# EAGLE board wordclock-r4-4x6 (EAGLE 5.11), part 1 of 2
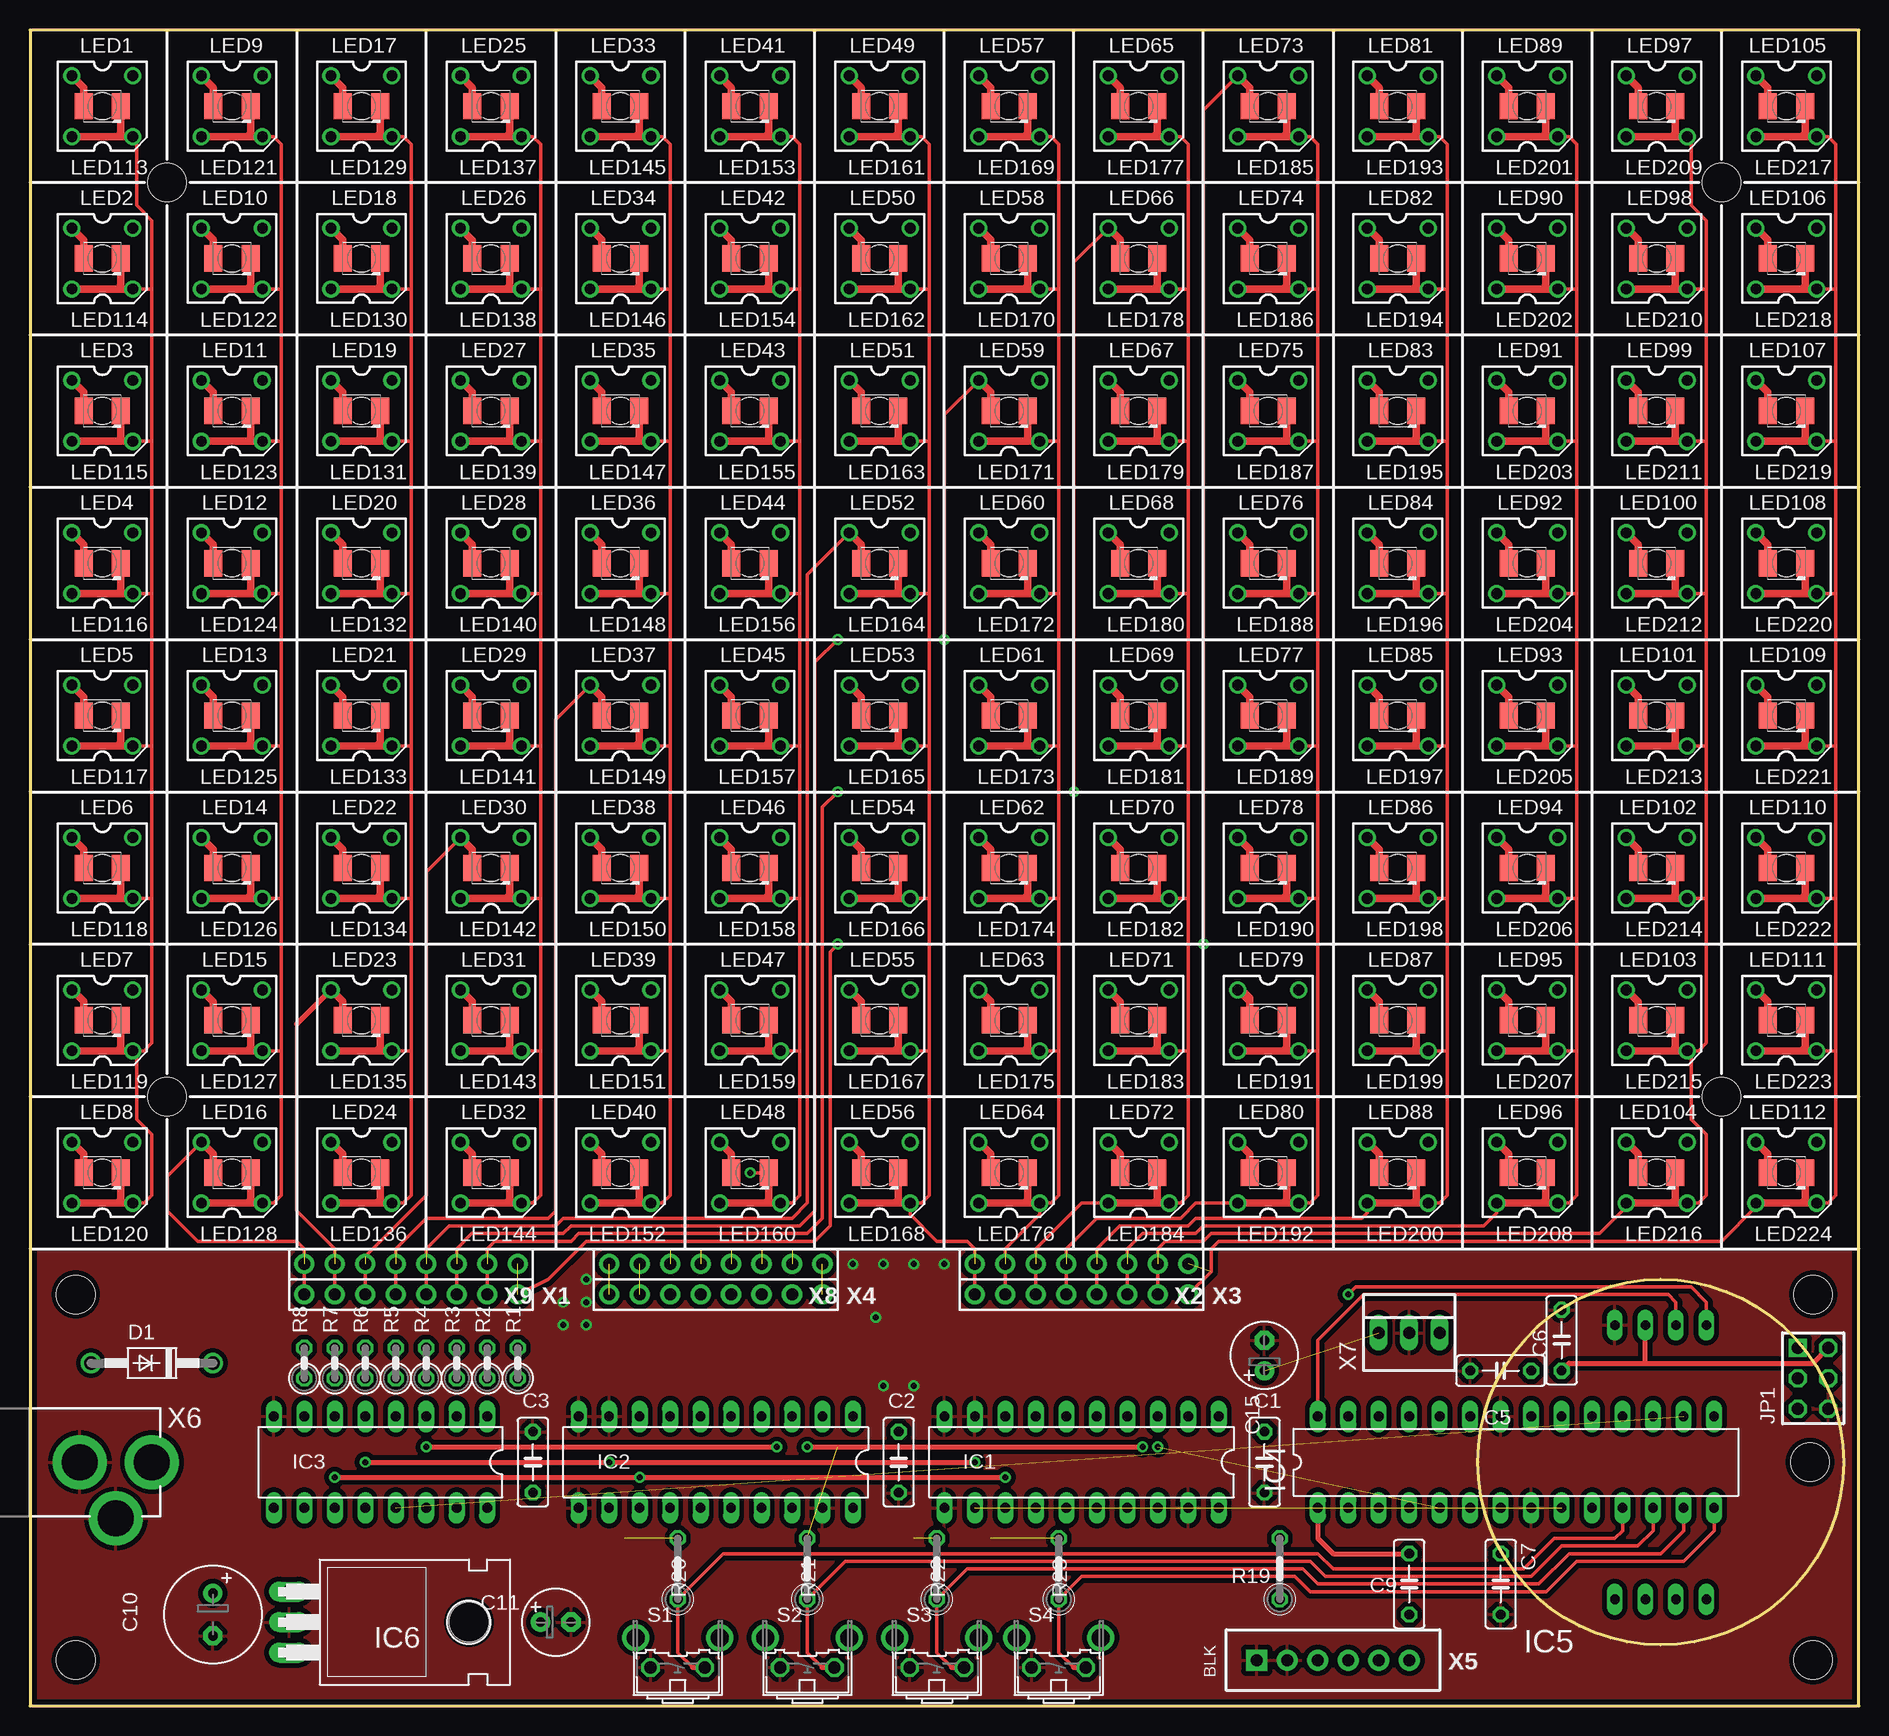
[diagram p0: board, top side]
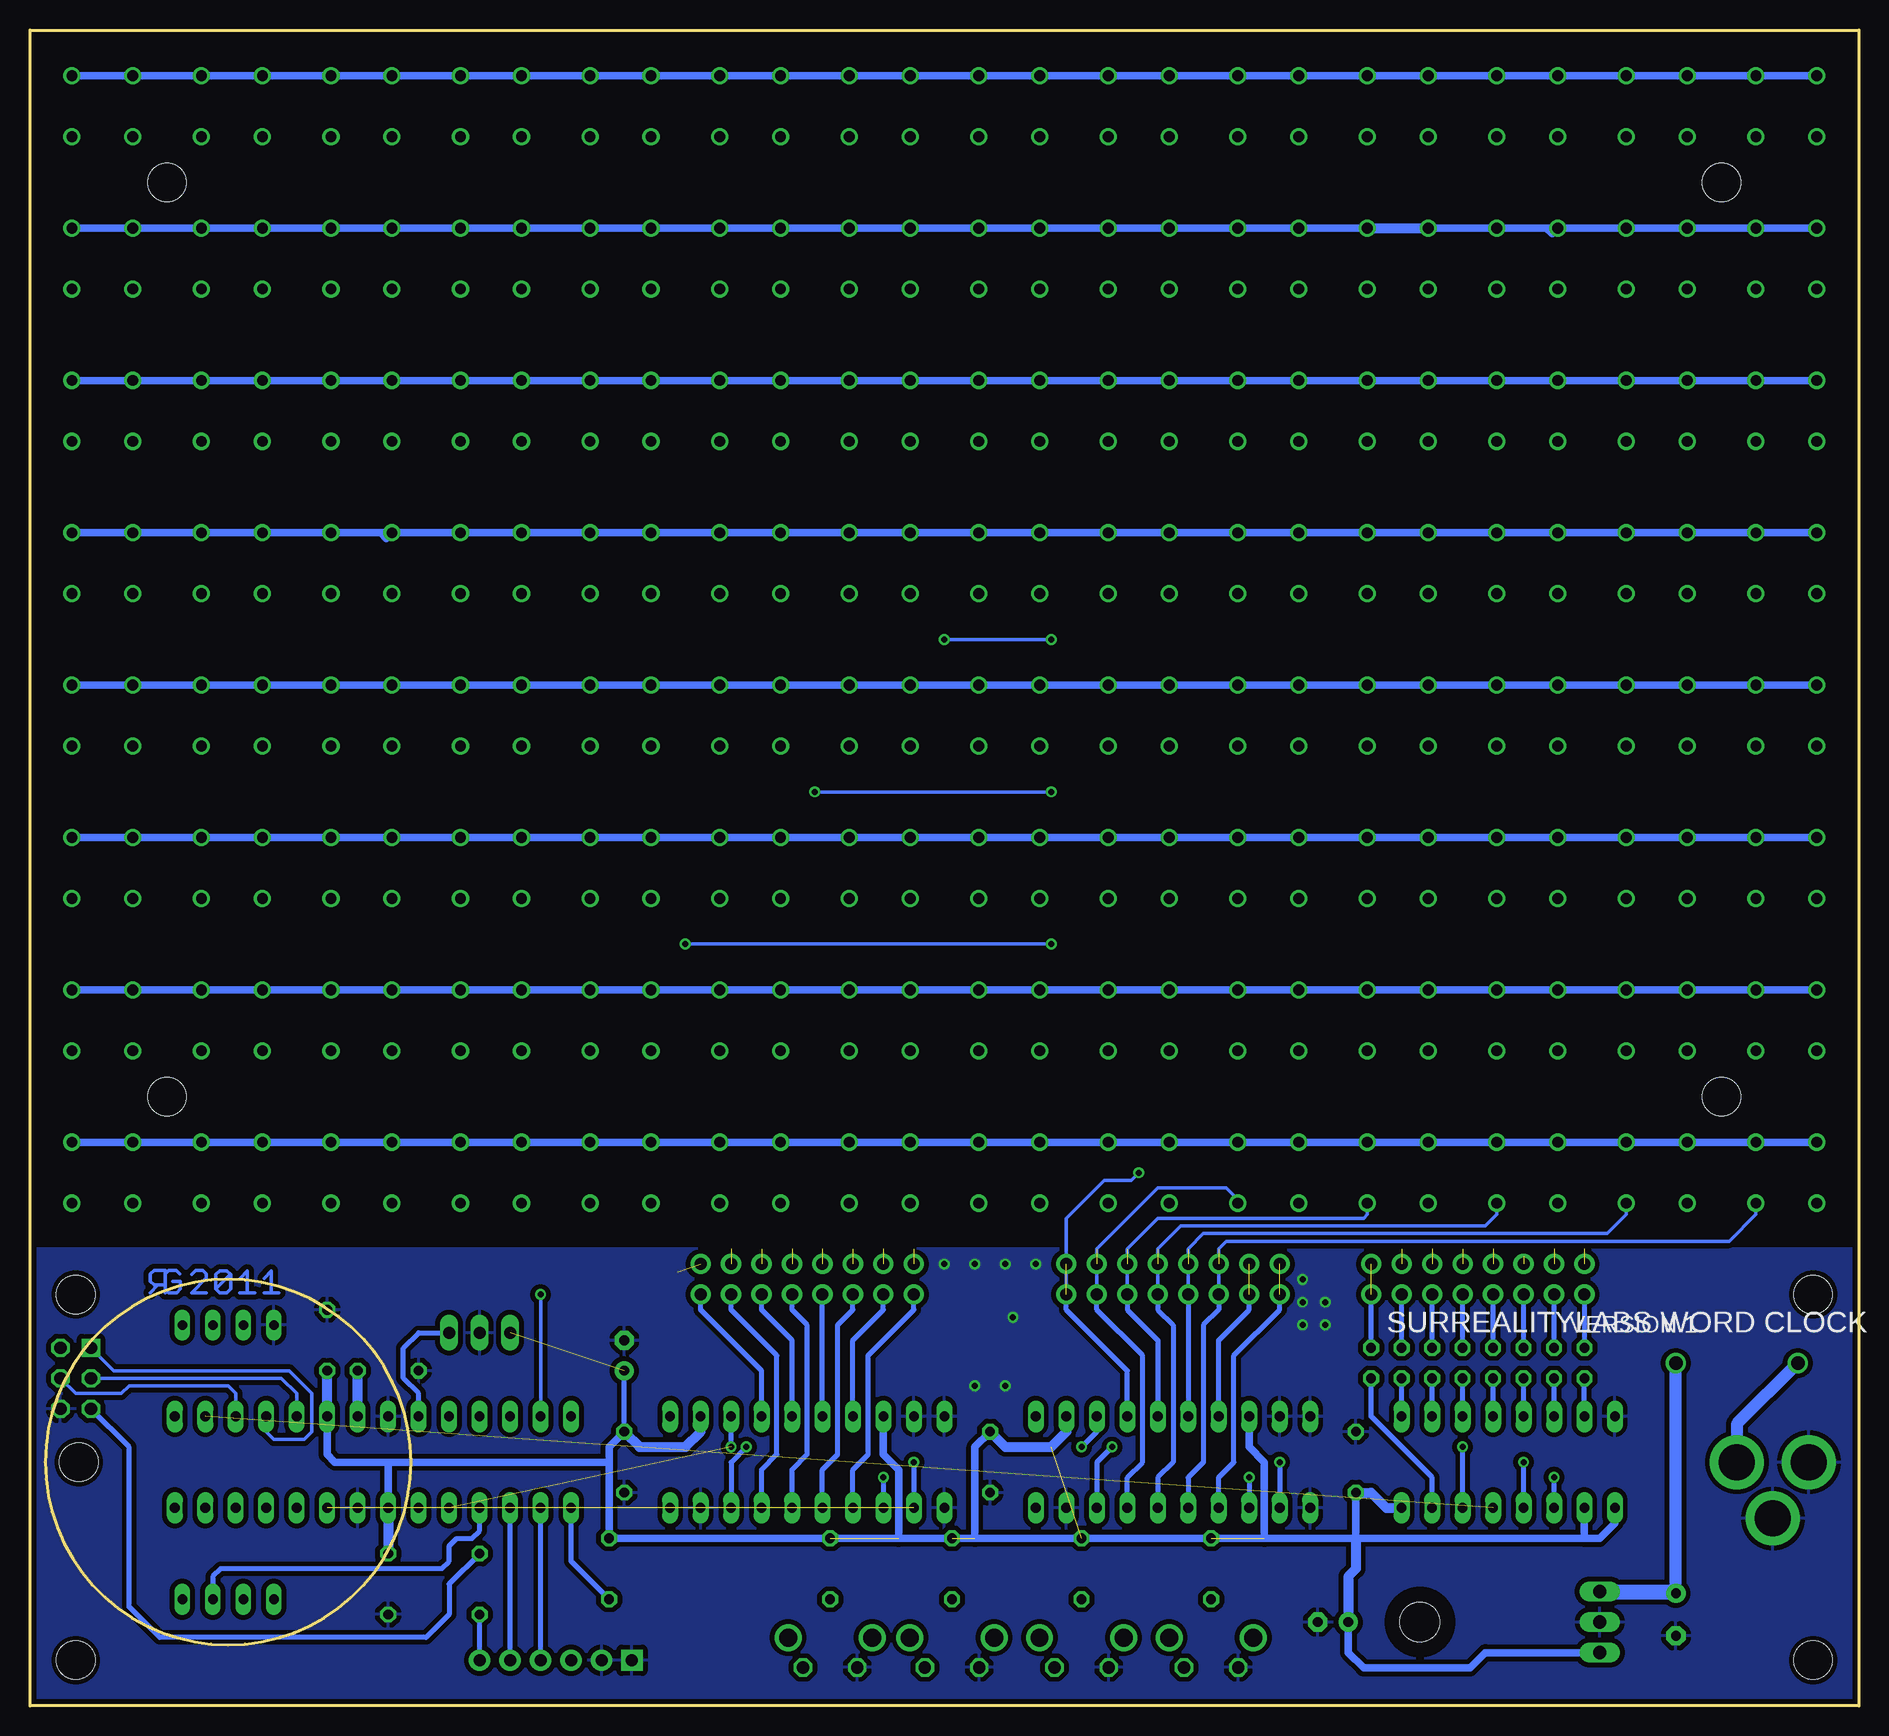
[diagram p1: board, bottom side, seen from below]

Size 152.4 x 139.7 mm. Coordinates in mm from the lower left corner, seen from the top.
Outline: 0,139.7 0,0 152.4,0 152.4,139.7 0,139.7
Copper layers (1*16): Top 0.035mm / dielectric 1.5mm / Bottom 0.035mm
Design rules "default *": minimum track width 10mil, minimum drill 19mil, track to track 10mil, track to pad 10mil, pad to pad 10mil, via to via 10mil, smd to smd 10mil, copper to edge 10mil, drill to drill 8mil, minimum pad ring 10mil, minimum via ring 8mil, stop-mask expansion 4mil, vias tented up to drill 20mil, thermal gap 16mil
Holes 3.2 mm at 3.81,34.29 148.59,34.29 148.59,3.81 3.81,3.81 11.43,50.8 140.97,50.8 140.97,127 11.43,127

## Footprints (pad centres in the part's own frame; a part is rotated, then mirrored left to right if it is on the bottom)
C050-025X075 = drill 0.813 octagon: 1 -2.54,0; 2 2.54,0
E3,5-8 = drill 0.813 pad 1.6 round: + -1.778,0 | drill 0.813 pad 1.6 octagon: - 1.778,0
E2,5-6 = drill 0.813 pad 1.6 round: + -1.27,0 | drill 0.813 pad 1.6 octagon: - 1.27,0
DO41-10 = drill 1.118 round: A 5.08,0; C -5.08,0
DIL20 = drill 0.813 long: 1 -11.43,-3.81; 2 -8.89,-3.81; 3 -6.35,-3.81; 4 -3.81,-3.81; 5 -1.27,-3.81; 6 1.27,-3.81; 7 3.81,-3.81; 8 6.35,-3.81; 9 8.89,-3.81; 10 11.43,-3.81; 11 11.43,3.81; 12 8.89,3.81; 13 6.35,3.81; 14 3.81,3.81; 15 1.27,3.81; 16 -1.27,3.81; 17 -3.81,3.81; 18 -6.35,3.81; 19 -8.89,3.81; 20 -11.43,3.81
DIL16 = drill 0.813 long: 1 -8.89,-3.81; 2 -6.35,-3.81; 3 -3.81,-3.81; 4 -1.27,-3.81; 5 1.27,-3.81; 6 3.81,-3.81; 7 6.35,-3.81; 8 8.89,-3.81; 9 8.89,3.81; 10 6.35,3.81; 11 3.81,3.81; 12 1.27,3.81; 13 -1.27,3.81; 14 -3.81,3.81; 15 -6.35,3.81; 16 -8.89,3.81
DIL28-3 = drill 0.813 long: 1 -16.51,-3.81; 2 -13.97,-3.81; 3 -11.43,-3.81; 4 -8.89,-3.81; 5 -6.35,-3.81; 6 -3.81,-3.81; 7 -1.27,-3.81; 8 1.27,-3.81; 9 3.81,-3.81; 10 6.35,-3.81; 11 8.89,-3.81; 12 11.43,-3.81; 13 13.97,-3.81; 14 16.51,-3.81; 15 16.51,3.81; 16 13.97,3.81; 17 11.43,3.81; 18 8.89,3.81; 19 6.35,3.81; 20 3.81,3.81; 21 1.27,3.81; 22 -1.27,3.81; 23 -3.81,3.81; 24 -6.35,3.81; 25 -8.89,3.81; 26 -11.43,3.81; 27 -13.97,3.81; 28 -16.51,3.81
CHRONODOT = drill 0.8 long: 1 -3.81,-11.43; 2 -1.27,-11.43; 3 1.27,-11.43; 4 3.81,-11.43; 5 3.81,11.43; 6 1.27,11.43; 7 -1.27,11.43; 8 -3.81,11.43 | hole 3.2: 12.446,0
TO220H = drill 1.118 long: 1 -2.54,-10.16; 2 0,-10.16; 3 2.54,-10.16 | hole 3.302: 0,4.826
AVR-ISP-6 = drill 1.016 square: 1 -2.54,-1.27 | drill 1.016 octagon: 2 -2.54,1.27; 3 0,-1.27; 4 0,1.27; 5 2.54,-1.27; 6 2.54,1.27
KA-3528ASYC = smd 1.5 x 2.2: A -1.55,0; C 1.55,0
SUPERFLUX-7.6X7.6 = drill 0.9 pad 1.422 round: 1 -2.54,2.54; 2 2.54,2.54; 3 -2.54,-2.54; 4 2.54,-2.54
0207/2V = drill 0.813 octagon: 1 -1.27,0; 2 1.27,0
0207/5V = drill 0.813 octagon: 1 -2.54,0; 2 2.54,0
B3F-31XX = drill 1.016 octagon: 1 -2.261,-1.245; 2 2.261,-1.245 | drill 1.499 pad 2.159 round: 3 -3.505,1.245; 4 3.505,1.245
100MIL-8 = drill 1 pad 1.676 round: 1 -8.89,0; 2 -6.35,0; 3 -3.81,0; 4 -1.27,0; 5 1.27,0; 6 3.81,0; 7 6.35,0; 8 8.89,0
USBCABLE-0.100-NOLBL = drill 1 pad 1.778 square: 1 0,-7.62 | drill 1 pad 1.778 round: 2 0,-5.08; 3 0,-2.54; 4 0,0; 5 0,2.54; 6 0,5.08
PJ-002 = drill 3 pad 4.5 round: 1 0,0; 2 0,6; 3 -4.7,3
22-23-2031 = drill 1 long: 1 -2.54,0; 2 0,0; 3 2.54,0

## Placement (x,y rotation side)
C1  [C050-025X075]  102.87,20.32 270 top
C2  [C050-025X075]  72.39,20.32 270 top
C3  [C050-025X075]  41.91,20.32 90 top
C5  [C050-025X075]  122.56,27.94 180 top
C6  [C050-025X075]  127.64,30.48 90 top
C7  [C050-025X075]  122.56,10.16 270 top
C9  [C050-025X075]  114.94,10.16 90 top
C10  100u  [E3,5-8]  15.24,7.62 270 top
C11  10u  [E2,5-6]  43.81,6.99 0 top
C15  10u  [E2,5-6]  102.87,29.21 90 top
D1  1N4004  [DO41-10]  10.16,28.58 180 top
IC1  TPIC6B595  [DIL20]  87.63,20.32 180 top
IC2  TPIC6B595  [DIL20]  57.15,20.32 180 top
IC3  74HC595N  [DIL16]  29.21,20.32 180 top
IC4  MEGA48/88/168-PU  [DIL28-3]  123.83,20.32 0 top
IC5  CHRONODOT  [CHRONODOT]  135.89,20.32 0 top
IC6  7805T  [TO220H]  31.75,6.99 270 top
JP1  AVR-ISP-6  [AVR-ISP-6]  148.59,27.3 270 top
LED1  [KA-3528ASYC]  6.03,133.35 0 top
LED2  [KA-3528ASYC]  6.03,120.65 0 top
LED3  [KA-3528ASYC]  6.03,107.95 0 top
LED4  [KA-3528ASYC]  6.03,95.25 0 top
LED5  [KA-3528ASYC]  6.03,82.55 0 top
LED6  [KA-3528ASYC]  6.03,69.85 0 top
LED7  [KA-3528ASYC]  6.03,57.15 0 top
LED8  [KA-3528ASYC]  6.03,44.45 0 top
LED9  [KA-3528ASYC]  16.83,133.35 0 top
LED10  [KA-3528ASYC]  16.83,120.65 0 top
LED11  [KA-3528ASYC]  16.83,107.95 0 top
LED12  [KA-3528ASYC]  16.83,95.25 0 top
LED13  [KA-3528ASYC]  16.83,82.55 0 top
LED14  [KA-3528ASYC]  16.83,69.85 0 top
LED15  [KA-3528ASYC]  16.83,57.15 0 top
LED16  [KA-3528ASYC]  16.83,44.45 0 top
LED17  [KA-3528ASYC]  27.62,133.35 0 top
LED18  [KA-3528ASYC]  27.62,120.65 0 top
LED19  [KA-3528ASYC]  27.62,107.95 0 top
LED20  [KA-3528ASYC]  27.62,95.25 0 top
LED21  [KA-3528ASYC]  27.62,82.55 0 top
LED22  [KA-3528ASYC]  27.62,69.85 0 top
LED23  [KA-3528ASYC]  27.62,57.15 0 top
LED24  [KA-3528ASYC]  27.62,44.45 0 top
LED25  [KA-3528ASYC]  38.42,133.35 0 top
LED26  [KA-3528ASYC]  38.42,120.65 0 top
LED27  [KA-3528ASYC]  38.42,107.95 0 top
LED28  [KA-3528ASYC]  38.42,95.25 0 top
LED29  [KA-3528ASYC]  38.42,82.55 0 top
LED30  [KA-3528ASYC]  38.42,69.85 0 top
LED31  [KA-3528ASYC]  38.42,57.15 0 top
LED32  [KA-3528ASYC]  38.42,44.45 0 top
LED33  [KA-3528ASYC]  49.21,133.35 0 top
LED34  [KA-3528ASYC]  49.21,120.65 0 top
LED35  [KA-3528ASYC]  49.21,107.95 0 top
LED36  [KA-3528ASYC]  49.21,95.25 0 top
LED37  [KA-3528ASYC]  49.21,82.55 0 top
LED38  [KA-3528ASYC]  49.21,69.85 0 top
LED39  [KA-3528ASYC]  49.21,57.15 0 top
LED40  [KA-3528ASYC]  49.21,44.45 0 top
LED41  [KA-3528ASYC]  60.01,133.35 0 top
LED42  [KA-3528ASYC]  60.01,120.65 0 top
LED43  [KA-3528ASYC]  60.01,107.95 0 top
LED44  [KA-3528ASYC]  60.01,95.25 0 top
LED45  [KA-3528ASYC]  60.01,82.55 0 top
LED46  [KA-3528ASYC]  60.01,69.85 0 top
LED47  [KA-3528ASYC]  60.01,57.15 0 top
LED48  [KA-3528ASYC]  60.01,44.45 0 top
LED49  [KA-3528ASYC]  70.8,133.35 0 top
LED50  [KA-3528ASYC]  70.8,120.65 0 top
LED51  [KA-3528ASYC]  70.8,107.95 0 top
LED52  [KA-3528ASYC]  70.8,95.25 0 top
LED53  [KA-3528ASYC]  70.8,82.55 0 top
LED54  [KA-3528ASYC]  70.8,69.85 0 top
LED55  [KA-3528ASYC]  70.8,57.15 0 top
LED56  [KA-3528ASYC]  70.8,44.45 0 top
LED57  [KA-3528ASYC]  81.6,133.35 0 top
LED58  [KA-3528ASYC]  81.6,120.65 0 top
LED59  [KA-3528ASYC]  81.6,107.95 0 top
LED60  [KA-3528ASYC]  81.6,95.25 0 top
LED61  [KA-3528ASYC]  81.6,82.55 0 top
LED62  [KA-3528ASYC]  81.6,69.85 0 top
LED63  [KA-3528ASYC]  81.6,57.15 0 top
LED64  [KA-3528ASYC]  81.6,44.45 0 top
LED65  [KA-3528ASYC]  92.39,133.35 0 top
LED66  [KA-3528ASYC]  92.39,120.65 0 top
LED67  [KA-3528ASYC]  92.39,107.95 0 top
LED68  [KA-3528ASYC]  92.39,95.25 0 top
LED69  [KA-3528ASYC]  92.39,82.55 0 top
LED70  [KA-3528ASYC]  92.39,69.85 0 top
LED71  [KA-3528ASYC]  92.39,57.15 0 top
LED72  [KA-3528ASYC]  92.39,44.45 0 top
LED73  [KA-3528ASYC]  103.19,133.35 0 top
LED74  [KA-3528ASYC]  103.19,120.65 0 top
LED75  [KA-3528ASYC]  103.19,107.95 0 top
LED76  [KA-3528ASYC]  103.19,95.25 0 top
LED77  [KA-3528ASYC]  103.19,82.55 0 top
LED78  [KA-3528ASYC]  103.19,69.85 0 top
LED79  [KA-3528ASYC]  103.19,57.15 0 top
LED80  [KA-3528ASYC]  103.19,44.45 0 top
LED81  [KA-3528ASYC]  113.98,133.35 0 top
LED82  [KA-3528ASYC]  113.98,120.65 0 top
LED83  [KA-3528ASYC]  113.98,107.95 0 top
LED84  [KA-3528ASYC]  113.98,95.25 0 top
LED85  [KA-3528ASYC]  113.98,82.55 0 top
LED86  [KA-3528ASYC]  113.98,69.85 0 top
LED87  [KA-3528ASYC]  113.98,57.15 0 top
LED88  [KA-3528ASYC]  113.98,44.45 0 top
LED89  [KA-3528ASYC]  124.78,133.35 0 top
LED90  [KA-3528ASYC]  124.78,120.65 0 top
LED91  [KA-3528ASYC]  124.78,107.95 0 top
LED92  [KA-3528ASYC]  124.78,95.25 0 top
LED93  [KA-3528ASYC]  124.78,82.55 0 top
LED94  [KA-3528ASYC]  124.78,69.85 0 top
LED95  [KA-3528ASYC]  124.78,57.15 0 top
LED96  [KA-3528ASYC]  124.78,44.45 0 top
LED97  [KA-3528ASYC]  135.57,133.35 0 top
LED98  [KA-3528ASYC]  135.57,120.65 0 top
LED99  [KA-3528ASYC]  135.57,107.95 0 top
LED100  [KA-3528ASYC]  135.57,95.25 0 top
LED101  [KA-3528ASYC]  135.57,82.55 0 top
LED102  [KA-3528ASYC]  135.57,69.85 0 top
LED103  [KA-3528ASYC]  135.57,57.15 0 top
LED104  [KA-3528ASYC]  135.57,44.45 0 top
LED105  [KA-3528ASYC]  146.37,133.35 0 top
LED106  [KA-3528ASYC]  146.37,120.65 0 top
LED107  [KA-3528ASYC]  146.37,107.95 0 top
LED108  [KA-3528ASYC]  146.37,95.25 0 top
LED109  [KA-3528ASYC]  146.37,82.55 0 top
LED110  [KA-3528ASYC]  146.37,69.85 0 top
LED111  [KA-3528ASYC]  146.37,57.15 0 top
LED112  [KA-3528ASYC]  146.37,44.45 0 top
LED113  [SUPERFLUX-7.6X7.6]  6.03,133.35 90 top
LED114  [SUPERFLUX-7.6X7.6]  6.03,120.65 90 top
LED115  [SUPERFLUX-7.6X7.6]  6.03,107.95 90 top
LED116  [SUPERFLUX-7.6X7.6]  6.03,95.25 90 top
LED117  [SUPERFLUX-7.6X7.6]  6.03,82.55 90 top
LED118  [SUPERFLUX-7.6X7.6]  6.03,69.85 90 top
LED119  [SUPERFLUX-7.6X7.6]  6.03,57.15 90 top
LED120  [SUPERFLUX-7.6X7.6]  6.03,44.45 90 top
LED121  [SUPERFLUX-7.6X7.6]  16.83,133.35 90 top
LED122  [SUPERFLUX-7.6X7.6]  16.83,120.65 90 top
LED123  [SUPERFLUX-7.6X7.6]  16.83,107.95 90 top
LED124  [SUPERFLUX-7.6X7.6]  16.83,95.25 90 top
LED125  [SUPERFLUX-7.6X7.6]  16.83,82.55 90 top
LED126  [SUPERFLUX-7.6X7.6]  16.83,69.85 90 top
LED127  [SUPERFLUX-7.6X7.6]  16.83,57.15 90 top
LED128  [SUPERFLUX-7.6X7.6]  16.83,44.45 90 top
LED129  [SUPERFLUX-7.6X7.6]  27.62,133.35 90 top
LED130  [SUPERFLUX-7.6X7.6]  27.62,120.65 90 top
LED131  [SUPERFLUX-7.6X7.6]  27.62,107.95 90 top
LED132  [SUPERFLUX-7.6X7.6]  27.62,95.25 90 top
LED133  [SUPERFLUX-7.6X7.6]  27.62,82.55 90 top
LED134  [SUPERFLUX-7.6X7.6]  27.62,69.85 90 top
LED135  [SUPERFLUX-7.6X7.6]  27.62,57.15 90 top
LED136  [SUPERFLUX-7.6X7.6]  27.62,44.45 90 top
LED137  [SUPERFLUX-7.6X7.6]  38.42,133.35 90 top
LED138  [SUPERFLUX-7.6X7.6]  38.42,120.65 90 top
LED139  [SUPERFLUX-7.6X7.6]  38.42,107.95 90 top
LED140  [SUPERFLUX-7.6X7.6]  38.42,95.25 90 top
LED141  [SUPERFLUX-7.6X7.6]  38.42,82.55 90 top
LED142  [SUPERFLUX-7.6X7.6]  38.42,69.85 90 top
LED143  [SUPERFLUX-7.6X7.6]  38.42,57.15 90 top
LED144  [SUPERFLUX-7.6X7.6]  38.42,44.45 90 top
LED145  [SUPERFLUX-7.6X7.6]  49.21,133.35 90 top
LED146  [SUPERFLUX-7.6X7.6]  49.21,120.65 90 top
LED147  [SUPERFLUX-7.6X7.6]  49.21,107.95 90 top
LED148  [SUPERFLUX-7.6X7.6]  49.21,95.25 90 top
LED149  [SUPERFLUX-7.6X7.6]  49.21,82.55 90 top
LED150  [SUPERFLUX-7.6X7.6]  49.21,69.85 90 top
LED151  [SUPERFLUX-7.6X7.6]  49.21,57.15 90 top
LED152  [SUPERFLUX-7.6X7.6]  49.21,44.45 90 top
LED153  [SUPERFLUX-7.6X7.6]  60.01,133.35 90 top
LED154  [SUPERFLUX-7.6X7.6]  60.01,120.65 90 top
LED155  [SUPERFLUX-7.6X7.6]  60.01,107.95 90 top
LED156  [SUPERFLUX-7.6X7.6]  60.01,95.25 90 top
LED157  [SUPERFLUX-7.6X7.6]  60.01,82.55 90 top
LED158  [SUPERFLUX-7.6X7.6]  60.01,69.85 90 top
LED159  [SUPERFLUX-7.6X7.6]  60.01,57.15 90 top
LED160  [SUPERFLUX-7.6X7.6]  60.01,44.45 90 top
LED161  [SUPERFLUX-7.6X7.6]  70.8,133.35 90 top
LED162  [SUPERFLUX-7.6X7.6]  70.8,120.65 90 top
LED163  [SUPERFLUX-7.6X7.6]  70.8,107.95 90 top
LED164  [SUPERFLUX-7.6X7.6]  70.8,95.25 90 top
LED165  [SUPERFLUX-7.6X7.6]  70.8,82.55 90 top
LED166  [SUPERFLUX-7.6X7.6]  70.8,69.85 90 top
LED167  [SUPERFLUX-7.6X7.6]  70.8,57.15 90 top
LED168  [SUPERFLUX-7.6X7.6]  70.8,44.45 90 top
LED169  [SUPERFLUX-7.6X7.6]  81.6,133.35 90 top
LED170  [SUPERFLUX-7.6X7.6]  81.6,120.65 90 top
LED171  [SUPERFLUX-7.6X7.6]  81.6,107.95 90 top
LED172  [SUPERFLUX-7.6X7.6]  81.6,95.25 90 top
LED173  [SUPERFLUX-7.6X7.6]  81.6,82.55 90 top
LED174  [SUPERFLUX-7.6X7.6]  81.6,69.85 90 top
LED175  [SUPERFLUX-7.6X7.6]  81.6,57.15 90 top
LED176  [SUPERFLUX-7.6X7.6]  81.6,44.45 90 top
LED177  [SUPERFLUX-7.6X7.6]  92.39,133.35 90 top
LED178  [SUPERFLUX-7.6X7.6]  92.39,120.65 90 top
LED179  [SUPERFLUX-7.6X7.6]  92.39,107.95 90 top
LED180  [SUPERFLUX-7.6X7.6]  92.39,95.25 90 top
LED181  [SUPERFLUX-7.6X7.6]  92.39,82.55 90 top
LED182  [SUPERFLUX-7.6X7.6]  92.39,69.85 90 top
LED183  [SUPERFLUX-7.6X7.6]  92.39,57.15 90 top
LED184  [SUPERFLUX-7.6X7.6]  92.39,44.45 90 top
LED185  [SUPERFLUX-7.6X7.6]  103.19,133.35 90 top
LED186  [SUPERFLUX-7.6X7.6]  103.19,120.65 90 top
LED187  [SUPERFLUX-7.6X7.6]  103.19,107.95 90 top
LED188  [SUPERFLUX-7.6X7.6]  103.19,95.25 90 top
LED189  [SUPERFLUX-7.6X7.6]  103.19,82.55 90 top
LED190  [SUPERFLUX-7.6X7.6]  103.19,69.85 90 top
LED191  [SUPERFLUX-7.6X7.6]  103.19,57.15 90 top
LED192  [SUPERFLUX-7.6X7.6]  103.19,44.45 90 top
LED193  [SUPERFLUX-7.6X7.6]  113.98,133.35 90 top
LED194  [SUPERFLUX-7.6X7.6]  113.98,120.65 90 top
LED195  [SUPERFLUX-7.6X7.6]  113.98,107.95 90 top
LED196  [SUPERFLUX-7.6X7.6]  113.98,95.25 90 top
LED197  [SUPERFLUX-7.6X7.6]  113.98,82.55 90 top
LED198  [SUPERFLUX-7.6X7.6]  113.98,69.85 90 top
LED199  [SUPERFLUX-7.6X7.6]  113.98,57.15 90 top
LED200  [SUPERFLUX-7.6X7.6]  113.98,44.45 90 top
LED201  [SUPERFLUX-7.6X7.6]  124.78,133.35 90 top
LED202  [SUPERFLUX-7.6X7.6]  124.78,120.65 90 top
LED203  [SUPERFLUX-7.6X7.6]  124.78,107.95 90 top
LED204  [SUPERFLUX-7.6X7.6]  124.78,95.25 90 top
LED205  [SUPERFLUX-7.6X7.6]  124.78,82.55 90 top
LED206  [SUPERFLUX-7.6X7.6]  124.78,69.85 90 top
LED207  [SUPERFLUX-7.6X7.6]  124.78,57.15 90 top
LED208  [SUPERFLUX-7.6X7.6]  124.78,44.45 90 top
LED209  [SUPERFLUX-7.6X7.6]  135.57,133.35 90 top
LED210  [SUPERFLUX-7.6X7.6]  135.57,120.65 90 top
LED211  [SUPERFLUX-7.6X7.6]  135.57,107.95 90 top
LED212  [SUPERFLUX-7.6X7.6]  135.57,95.25 90 top
LED213  [SUPERFLUX-7.6X7.6]  135.57,82.55 90 top
LED214  [SUPERFLUX-7.6X7.6]  135.57,69.85 90 top
LED215  [SUPERFLUX-7.6X7.6]  135.57,57.15 90 top
LED216  [SUPERFLUX-7.6X7.6]  135.57,44.45 90 top
LED217  [SUPERFLUX-7.6X7.6]  146.37,133.35 90 top
LED218  [SUPERFLUX-7.6X7.6]  146.37,120.65 90 top
LED219  [SUPERFLUX-7.6X7.6]  146.37,107.95 90 top
LED220  [SUPERFLUX-7.6X7.6]  146.37,95.25 90 top
LED221  [SUPERFLUX-7.6X7.6]  146.37,82.55 90 top
LED222  [SUPERFLUX-7.6X7.6]  146.37,69.85 90 top
LED223  [SUPERFLUX-7.6X7.6]  146.37,57.15 90 top
LED224  [SUPERFLUX-7.6X7.6]  146.37,44.45 90 top
R1  [0207/2V]  40.64,28.58 90 top
R2  [0207/2V]  38.1,28.58 90 top
R3  [0207/2V]  35.56,28.58 90 top
R4  [0207/2V]  33.02,28.58 90 top
R5  [0207/2V]  30.48,28.58 90 top
R6  [0207/2V]  27.94,28.58 90 top
R7  [0207/2V]  25.4,28.58 90 top
R8  [0207/2V]  22.86,28.58 90 top
R19  [0207/5V]  104.14,11.43 90 top
R20  [0207/5V]  53.98,11.43 90 top
R21  [0207/5V]  64.77,11.43 90 top
R22  [0207/5V]  75.56,11.43 90 top
R23  [0207/5V]  85.72,11.43 90 top
S1  [B3F-31XX]  53.98,4.45 0 top
S2  [B3F-31XX]  64.77,4.45 0 top
S3  [B3F-31XX]  75.56,4.45 0 top
S4  [B3F-31XX]  85.72,4.45 0 top
U$1  [RGLOGO_SMALL_2011]  140.97,34.29 0 bottom
U$2  [SURREALITY_LOGO_SILK]  188.59,55.88 0 bottom  (outside the outline)
X1  M08-100MIL  [100MIL-8]  31.75,34.29 180 top
X2  M08-100MIL  [100MIL-8]  87.63,36.83 180 top
X3  M08-100MIL  [100MIL-8]  87.63,34.29 180 top
X4  M08-100MIL  [100MIL-8]  57.15,34.29 180 top
X5  TTL-232R-5VN  [USBCABLE-0.100-NOLBL]  109.86,3.81 270 top
X6  PJ-002B  [PJ-002]  10.16,20.32 90 top
X7  22-23-2031  [22-23-2031]  114.94,31.12 0 top
X8  M08-100MIL  [100MIL-8]  57.15,36.83 180 top
X9  M08-100MIL  [100MIL-8]  31.75,36.83 180 top

## Library data of the parts
C1-C3 C5-C7 C9-C11 C15 R1-R8 R19-R23 = rcl
D1 = diode
IC1 IC2 = rbg-ti-powerlogic
IC3 = 74xx-us
IC4 = avr-5
IC5 = rbg-macetech-rtc
IC6 = linear
JP1 = avr-5-4.16
LED1-LED224 = led
S1-S4 = switch-omron
U$1 U$2 = rbg-logos
X1-X4 X8 X9 = rbg-generic-headers
X5 = rbg-ftdi-usb
X6 = rbg-cui-dcpower
X7 = con-molex; MF: MOLEX; MPN: 22-23-2031; OC_FARNELL: 1462950; OC_NEWARK: 30C0862

## Nets
+5V: C1.1 C2.1 C3.1 C6.1 C7.1 C11.+ C15.+ IC1.2 IC1.8 IC2.2 IC2.8 IC3.10 IC3.16 IC4.7 IC4.20 IC5.7 IC6.3 JP1.2 R19.2 R20.2 R21.2 R22.2 R23.2 X7.1
BRIGHT: IC3.13 IC4.16
BUTTON1: IC4.11 R20.1 S1.2
BUTTON2: IC4.12 R21.1 S2.2
BUTTON3: IC4.13 R22.1 S3.2
BUTTON4: IC4.14 R23.1 S4.2
CLOCK: IC1.13 IC2.13 IC3.11 IC4.9
COL1: IC1.4 LED105.C LED106.C LED107.C LED108.C LED109.C LED110.C LED111.C LED112.C LED217.1 LED217.3 LED218.1 LED218.3 LED219.1 LED219.3 LED220.1 LED220.3 LED221.1 LED221.3 LED222.1 LED222.3 LED223.1 LED223.3 LED224.1 LED224.3 X2.1 X3.1
COL2: IC1.17 LED97.C LED98.C LED99.C LED100.C LED101.C LED102.C LED103.C LED104.C LED209.1 LED209.3 LED210.1 LED210.3 LED211.1 LED211.3 LED212.1 LED212.3 LED213.1 LED213.3 LED214.1 LED214.3 LED215.1 LED215.3 LED216.1 LED216.3 X2.2 X3.2
COL3: IC1.5 LED89.C LED90.C LED91.C LED92.C LED93.C LED94.C LED95.C LED96.C LED201.1 LED201.3 LED202.1 LED202.3 LED203.1 LED203.3 LED204.1 LED204.3 LED205.1 LED205.3 LED206.1 LED206.3 LED207.1 LED207.3 LED208.1 LED208.3 X2.3 X3.3
COL4: IC1.16 LED81.C LED82.C LED83.C LED84.C LED85.C LED86.C LED87.C LED88.C LED193.1 LED193.3 LED194.1 LED194.3 LED195.1 LED195.3 LED196.1 LED196.3 LED197.1 LED197.3 LED198.1 LED198.3 LED199.1 LED199.3 LED200.1 LED200.3 X2.4 X3.4
COL5: IC1.6 LED73.C LED74.C LED75.C LED76.C LED77.C LED78.C LED79.C LED80.C LED185.1 LED185.3 LED186.1 LED186.3 LED187.1 LED187.3 LED188.1 LED188.3 LED189.1 LED189.3 LED190.1 LED190.3 LED191.1 LED191.3 LED192.1 LED192.3 X2.5 X3.5
COL6: IC1.15 LED65.C LED66.C LED67.C LED68.C LED69.C LED70.C LED71.C LED72.C LED177.1 LED177.3 LED178.1 LED178.3 LED179.1 LED179.3 LED180.1 LED180.3 LED181.1 LED181.3 LED182.1 LED182.3 LED183.1 LED183.3 LED184.1 LED184.3 X2.6 X3.6
COL7: IC1.7 LED57.C LED58.C LED59.C LED60.C LED61.C LED62.C LED63.C LED64.C LED169.1 LED169.3 LED170.1 LED170.3 LED171.1 LED171.3 LED172.1 LED172.3 LED173.1 LED173.3 LED174.1 LED174.3 LED175.1 LED175.3 LED176.1 LED176.3 X2.7 X3.7
COL8: IC1.14 LED49.C LED50.C LED51.C LED52.C LED53.C LED54.C LED55.C LED56.C LED161.1 LED161.3 LED162.1 LED162.3 LED163.1 LED163.3 LED164.1 LED164.3 LED165.1 LED165.3 LED166.1 LED166.3 LED167.1 LED167.3 LED168.1 LED168.3 X2.8 X3.8
COL9: IC2.4 LED41.C LED42.C LED43.C LED44.C LED45.C LED46.C LED47.C LED48.C LED153.1 LED153.3 LED154.1 LED154.3 LED155.1 LED155.3 LED156.1 LED156.3 LED157.1 LED157.3 LED158.1 LED158.3 LED159.1 LED159.3 LED160.1 LED160.3 X4.1 X8.1
COL10: IC2.17 LED33.C LED34.C LED35.C LED36.C LED37.C LED38.C LED39.C LED40.C LED145.1 LED145.3 LED146.1 LED146.3 LED147.1 LED147.3 LED148.1 LED148.3 LED149.1 LED149.3 LED150.1 LED150.3 LED151.1 LED151.3 LED152.1 LED152.3 X4.2 X8.2
COL11: IC2.5 LED25.C LED26.C LED27.C LED28.C LED29.C LED30.C LED31.C LED32.C LED137.1 LED137.3 LED138.1 LED138.3 LED139.1 LED139.3 LED140.1 LED140.3 LED141.1 LED141.3 LED142.1 LED142.3 LED143.1 LED143.3 LED144.1 LED144.3 X4.3 X8.3
COL12: IC2.16 LED17.C LED18.C LED19.C LED20.C LED21.C LED22.C LED23.C LED24.C LED129.1 LED129.3 LED130.1 LED130.3 LED131.1 LED131.3 LED132.1 LED132.3 LED133.1 LED133.3 LED134.1 LED134.3 LED135.1 LED135.3 LED136.1 LED136.3 X4.4 X8.4
COL13: IC2.6 LED9.C LED10.C LED11.C LED12.C LED13.C LED14.C LED15.C LED16.C LED121.1 LED121.3 LED122.1 LED122.3 LED123.1 LED123.3 LED124.1 LED124.3 LED125.1 LED125.3 LED126.1 LED126.3 LED127.1 LED127.3 LED128.1 LED128.3 X4.5 X8.5
COL14: IC2.15 LED1.C LED2.C LED3.C LED4.C LED5.C LED6.C LED7.C LED8.C LED113.1 LED113.3 LED114.1 LED114.3 LED115.1 LED115.3 LED116.1 LED116.3 LED117.1 LED117.3 LED118.1 LED118.3 LED119.1 LED119.3 LED120.1 LED120.3 X4.6 X8.6
COL15: IC2.7 X4.7 X8.7
COL16: IC2.14 X4.8 X8.8
DATA: IC1.3 IC4.5
GND: C1.2 C2.2 C3.2 C5.2 C6.2 C7.2 C10.- C11.- C15.- IC1.9 IC1.10 IC1.11 IC1.19 IC2.9 IC2.10 IC2.11 IC2.19 IC3.8 IC4.8 IC4.22 IC5.8 IC6.2 JP1.6 S1.1 S2.1 S3.1 S4.1 X5.1 X5.2 X6.2 X6.3 X7.2
INT: IC4.4 IC5.3
LIGHTSENSOR: IC4.23 X7.3
LOAD: IC1.12 IC2.12 IC3.12 IC4.6
MISO: IC4.18 JP1.1
MOSI: IC4.17 JP1.4
N$4: IC1.18 IC2.3
N$5: IC2.18 IC3.14
N$6: IC3.9
N$7: IC3.15 R1.1
N$8: IC3.1 R2.1
N$9: IC3.2 R3.1
N$10: IC3.3 R4.1
N$11: IC3.4 R5.1
N$12: IC3.5 R6.1
N$13: IC3.6 R7.1
N$14: IC3.7 R8.1
N$15: C9.1 X5.6
N$54: C5.1 IC4.21
N$56: D1.A X6.1
N$57: C10.+ D1.C IC6.1
RESET: C9.2 IC4.1 JP1.5 R19.1
ROW1: LED1.A LED9.A LED17.A LED25.A LED33.A LED41.A LED49.A LED57.A LED65.A LED73.A LED81.A LED89.A LED97.A LED105.A LED113.2 LED113.4 LED121.2 LED121.4 LED129.2 LED129.4 LED137.2 LED137.4 LED145.2 LED145.4 LED153.2 LED153.4 LED161.2 LED161.4 LED169.2 LED169.4 LED177.2 LED177.4 LED185.2 LED185.4 LED193.2 LED193.4 LED201.2 LED201.4 LED209.2 LED209.4 LED217.2 LED217.4 R1.2 X1.1 X9.1
ROW2: LED2.A LED10.A LED18.A LED26.A LED34.A LED42.A LED50.A LED58.A LED66.A LED74.A LED82.A LED90.A LED98.A LED106.A LED114.2 LED114.4 LED122.2 LED122.4 LED130.2 LED130.4 LED138.2 LED138.4 LED146.2 LED146.4 LED154.2 LED154.4 LED162.2 LED162.4 LED170.2 LED170.4 LED178.2 LED178.4 LED186.2 LED186.4 LED194.2 LED194.4 LED202.2 LED202.4 LED210.2 LED210.4 LED218.2 LED218.4 R2.2 X1.2 X9.2
ROW3: LED3.A LED11.A LED19.A LED27.A LED35.A LED43.A LED51.A LED59.A LED67.A LED75.A LED83.A LED91.A LED99.A LED107.A LED115.2 LED115.4 LED123.2 LED123.4 LED131.2 LED131.4 LED139.2 LED139.4 LED147.2 LED147.4 LED155.2 LED155.4 LED163.2 LED163.4 LED171.2 LED171.4 LED179.2 LED179.4 LED187.2 LED187.4 LED195.2 LED195.4 LED203.2 LED203.4 LED211.2 LED211.4 LED219.2 LED219.4 R3.2 X1.3 X9.3
ROW4: LED4.A LED12.A LED20.A LED28.A LED36.A LED44.A LED52.A LED60.A LED68.A LED76.A LED84.A LED92.A LED100.A LED108.A LED116.2 LED116.4 LED124.2 LED124.4 LED132.2 LED132.4 LED140.2 LED140.4 LED148.2 LED148.4 LED156.2 LED156.4 LED164.2 LED164.4 LED172.2 LED172.4 LED180.2 LED180.4 LED188.2 LED188.4 LED196.2 LED196.4 LED204.2 LED204.4 LED212.2 LED212.4 LED220.2 LED220.4 R4.2 X1.4 X9.4
ROW5: LED5.A LED13.A LED21.A LED29.A LED37.A LED45.A LED53.A LED61.A LED69.A LED77.A LED85.A LED93.A LED101.A LED109.A LED117.2 LED117.4 LED125.2 LED125.4 LED133.2 LED133.4 LED141.2 LED141.4 LED149.2 LED149.4 LED157.2 LED157.4 LED165.2 LED165.4 LED173.2 LED173.4 LED181.2 LED181.4 LED189.2 LED189.4 LED197.2 LED197.4 LED205.2 LED205.4 LED213.2 LED213.4 LED221.2 LED221.4 R5.2 X1.5 X9.5
ROW6: LED6.A LED14.A LED22.A LED30.A LED38.A LED46.A LED54.A LED62.A LED70.A LED78.A LED86.A LED94.A LED102.A LED110.A LED118.2 LED118.4 LED126.2 LED126.4 LED134.2 LED134.4 LED142.2 LED142.4 LED150.2 LED150.4 LED158.2 LED158.4 LED166.2 LED166.4 LED174.2 LED174.4 LED182.2 LED182.4 LED190.2 LED190.4 LED198.2 LED198.4 LED206.2 LED206.4 LED214.2 LED214.4 LED222.2 LED222.4 R6.2 X1.6 X9.6
ROW7: LED7.A LED15.A LED23.A LED31.A LED39.A LED47.A LED55.A LED63.A LED71.A LED79.A LED87.A LED95.A LED103.A LED111.A LED119.2 LED119.4 LED127.2 LED127.4 LED135.2 LED135.4 LED143.2 LED143.4 LED151.2 LED151.4 LED159.2 LED159.4 LED167.2 LED167.4 LED175.2 LED175.4 LED183.2 LED183.4 LED191.2 LED191.4 LED199.2 LED199.4 LED207.2 LED207.4 LED215.2 LED215.4 LED223.2 LED223.4 R7.2 X1.7 X9.7
ROW8: LED8.A LED16.A LED24.A LED32.A LED40.A LED48.A LED56.A LED64.A LED72.A LED80.A LED88.A LED96.A LED104.A LED112.A LED120.2 LED120.4 LED128.2 LED128.4 LED136.2 LED136.4 LED144.2 LED144.4 LED152.2 LED152.4 LED160.2 LED160.4 LED168.2 LED168.4 LED176.2 LED176.4 LED184.2 LED184.4 LED192.2 LED192.4 LED200.2 LED200.4 LED208.2 LED208.4 LED216.2 LED216.4 LED224.2 LED224.4 R8.2 X1.8 X9.8
RXD: IC4.2 X5.4
SCK: IC4.19 JP1.3
SCL: IC4.28 IC5.6
SDA: IC4.27 IC5.5
TXD: IC4.3 X5.5